# Altium PCB MAM17_chopper.PcbDoc
Units mil, origin at the board's own origin, x right, y up, seen from the top; angles counter-clockwise.
Board outline 3937.08 x 4724.82 mil, 2 copper layers (Top Layer, Bottom Layer); 31 components, 42 nets, 94 pads, 16 vias.
Unrouted connection lines stored in the file: 15.
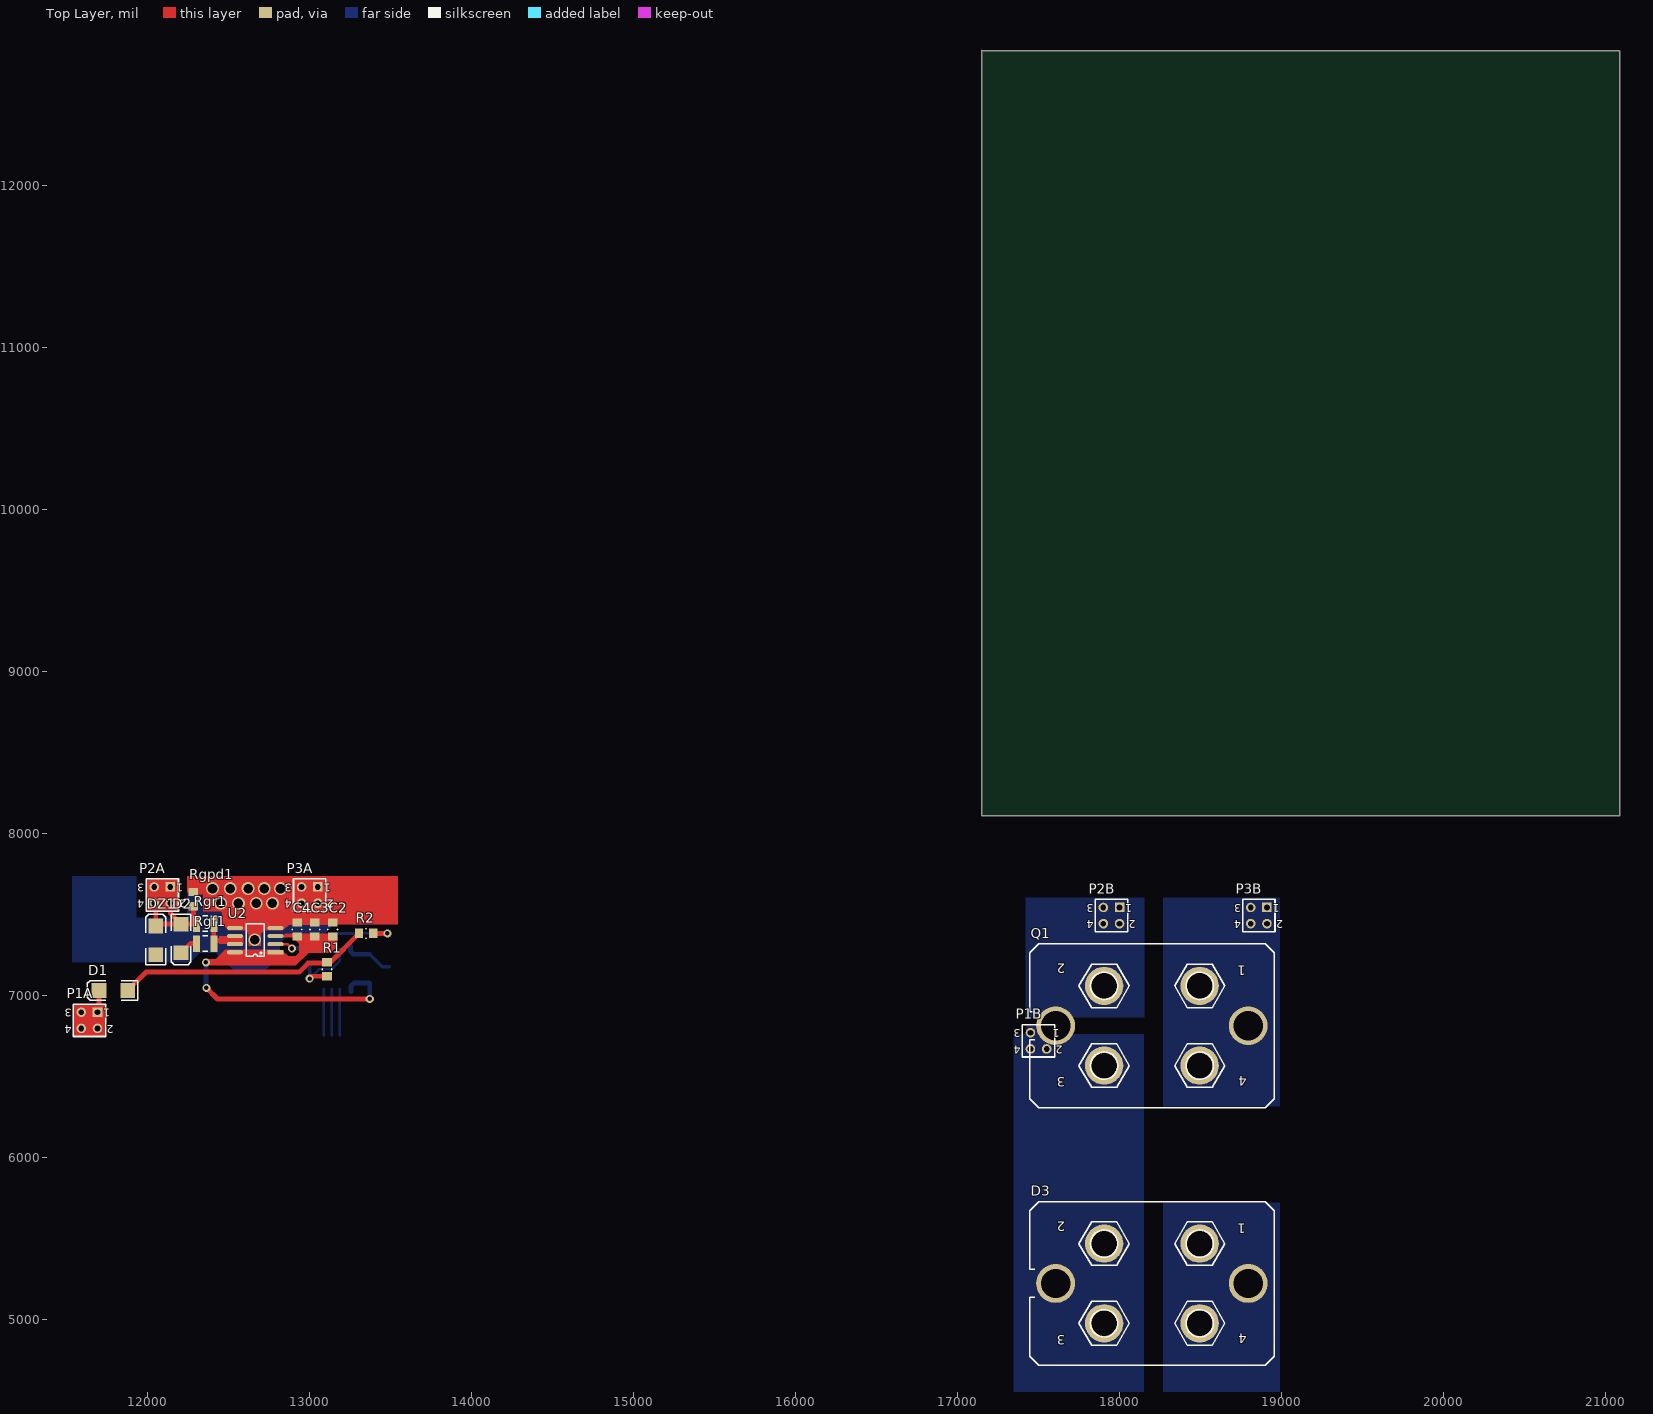
[diagram p0: Top Layer view]
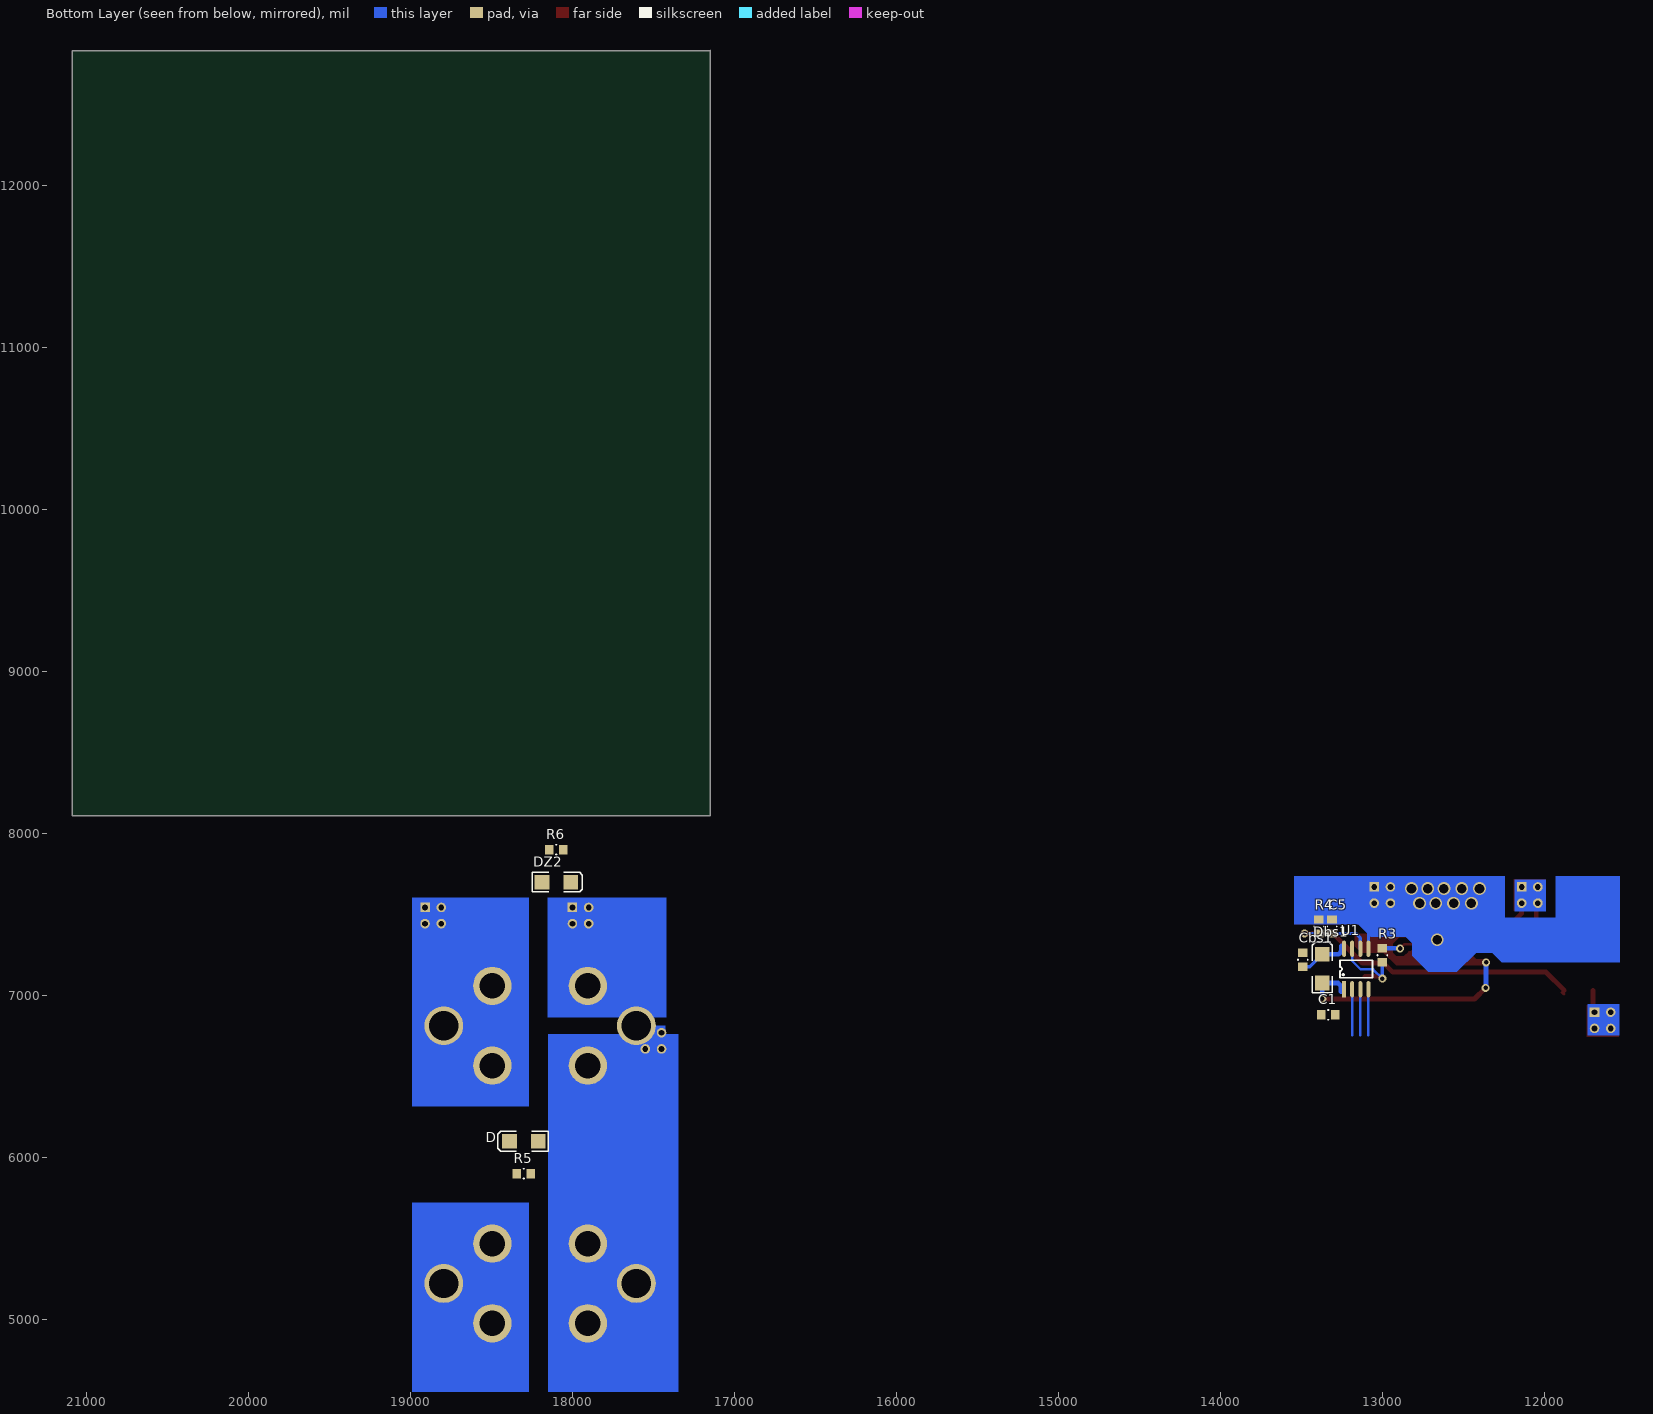
[diagram p1: Bottom Layer view, seen from below]

## Layer stack, top to bottom
Top Layer: signal copper 1.4
Dielectric: dielectric 12.6, FR-4, Dk 4.8
Bottom Layer: signal copper 1.4

## Board outline
17150,8110 17150,12834.41 17149.96,12833.98 21086.97,12833.98 21087,12834 21087,8109.59 21087.04,8110.02

## Design rules (kind name [scope] priority, off if disabled: settings)
Clearance [All] p1: gap=20
PolygonConnect [All] p1: connectstyle=Relief reliefconductorwidth=10 reliefentries=4 polygonreliefangle="90 Angle"
RoomDefinition driver [InComponentClass('driver')] p1: confinementstyle=ConfineIn formatcopy=TRUE lockcomponents=FALSE outline 0,0 2000,0 2000,1000 0,1000
RoomDefinition chopper [InComponentClass('chopper')] p2: confinementstyle=ConfineIn formatcopy=TRUE lockcomponents=FALSE outline 0,0 2000,0 2000,1000 0,1000
RoomDefinition atmega [InComponentClass('atmega')] p3: confinementstyle=ConfineIn formatcopy=TRUE lockcomponents=FALSE outline 0,0 2000,0 2000,1000 0,1000
RoutingVias [All] p1: holewidth=28 width=50 viastyle="Through Hole" minholewidth=28 minwidth=50 maxholewidth=78.74 maxwidth=78.74
SilkscreenOverComponentPads [All] p1: minsilkscreentomaskgap=10
SolderMaskExpansion [All] p1: expansion=4
Width [All] p1: maxlimit=30 minlimit=15 preferedwidth=20
27 further rules are at their usual default settings.

## Classes and differential pairs
component class chopper: C6 C7 C8 C9 C10 C11 C12 C13 C1009 D D3 DZ2 P1B P2B P3B Q1 R5 R6
component class driver: C1 C2 C3 C4 C5 Cbs1 D1 D2 Dbs1 DZ1 P1 P1A P2 P2A P3 P3A R1 R2 R3 R4 Rgf1 Rgpd1 Rgr1 U1 U2 U*1

## Components (designator, comment, footprint, x,y, rotation, side; value= is the part's Value field where it differs from the comment)
C1 "100nF" 0805C 13334.02,6879.91 r180 bottom
C2 "100nF" 0805C 13142,7407.68 r90 top
C3 "1uF" 0805C 13032,7407.68 r90 top
C4 "10uF" 0805C 12922,7407.68 r90 top
C5 "100nF" 0805C 13310.73,7426.18 r90 bottom
Cbs1 "100nF" 0805C 13491,7221 r90 bottom
D "ES3B" DSO-C2/X2.3 18300,6100 r0 bottom
D1 "BYD77" DSO-C2/X2.3 11788,7031 r180 top
D2 "ES3B" DSO-C2/X2.3 12206,7352 r270 top
D3 "DSEI2x101" SOT-227B 18200,5222 r180 top locked
Dbs1 "BAV102" DSO-C2/X2.3 13371.02,7165.91 r90 bottom
DZ1 "Z15V" DSO-C2/X2.3 12050,7340 r90 top
DZ2 "Z15V" DSO-C2/X2.3 18100,7700 r180 bottom
P1A "DRAIN" HDR2X2 11690,6896.68 r180 top locked
P1B "DRAIN" HDR2X2 17550,6770 r180 top locked
P2A "GATE" HDR2X2 12140,7670 r180 top locked
P2B "GATE" HDR2X2 18000,7543.32 r180 top locked
P3A "SOURCE" HDR2X2 13050,7670 r180 top locked
P3B "SOURCE" HDR2X2 18910,7543.32 r180 top locked
Q1 "IXFN420N10T" SOT-227B 18200,6813 r180 top locked
R1 "22K" 0805R 13107,7162 r90 top
R2 "10K" 0805R 13348.43,7382.87 r180 top
R3 "0R" 0805R 13000.02,7248.58 r90 bottom
R4 "820R" 0805R 13391.73,7426.18 r270 bottom
R5 "???" 0805R 18300,5900 r180 bottom
R6 "10k" 0805R 18100,7900 r180 bottom
Rgf1 "4R7" RESC3225L 12355,7320 r0 top
Rgpd1 "10k" 0805R 12282,7595 r270 top
Rgr1 "10R" RESC3225L 12355,7444 r0 top
U1 "IR2127S" SOIC08-150(50) 13236.02,7038.58 r180 bottom
U2 "UCC2732x" SOIC08-THERMAL 12789,7266.68 r90 top

## Footprints (in the part's own frame and the unit in brackets; to place one, negate y for a bottom-side part, rotate by r counter-clockwise, add the part's x,y. Pads: shape width x height; smd on the part's side, far side on the other; paste and mask are expansions set on the pad)
0805C [mm] "Chip Capacitor; Body 2 x 1.3 mm (LxW typ)"
  rect 1.3x1.5 smd: 1(-1.1,0) 2(1.1,0)
  silkscreen extent -0.05,-0.76 0.05,0.76, body extent -1,-0.64 1,0.62, height 0.78
0805R [mm] "Chip Resistor; Body 2 x 1.3 mm (LxW typ)"
  rect 1.3x1.5 smd: 1(1.1,0) 2(-1.1,0)
  silkscreen extent -0.05,-0.76 0.05,0.76, body extent -0.99,-0.63 1.01,0.63, height 0.8
DSO-C2/X2.3 [mm] "DO-214-AA/SMB; 2 C-Bend Leads; Body 5.3 x 3.6 mm, inc. leads (LxW)"
  rect 2.3x2.3 smd: 1(-2.25,0) 2(2.25,0)
  silkscreen extent -3.8,-1.55 4.1,1.55, body extent -2.62,-1.35 2.58,1.32, height 1.34
HDR2X2 [mm] "Connector; Header; 2x2 Position"
  rect 1.5x1.5 hole 0.9: 1(0,0)
  round 1.5 hole 0.9: 2(0,2.54) 3(2.54,0) 4(2.54,2.54)
  silkscreen extent -1.27,-1.27 3.81,3.81
RESC3225L [mm] "Chip Resistor, Body 3.2x2.5mm, IPC High Density"
  rect 1.1x2.6 smd: 1(-1.35,0) 2(1.35,0)
  silkscreen extent -0.4,-1.2 0.4,1.2, body extent -1.6,-0.79 1.6,0.81, height 0.55
SOIC08-150(50) [mil] "SOIC; 8 Leads; Row Spacing 3.81 mm; Pitch 1.27 mm; 3D Antonio Fagaldo"
  rect 25x100 smd: 1(0,0)
  oval 25x100 smd: 2(50,0) 3(100,0) 4(150,0) 5(150,250) 6(100,250) 7(50,250) 8(0,250)
  silkscreen extent -25,70 175,180, body extent -20,4 173,246, height 69
SOIC08-THERMAL [mil] "SOIC; 8 Leads; Row Spacing 3.81 mm; Pitch 1.27 mm; 3D Antonio Fagaldo"
  rect 25x100 smd: 1(0,0)
  oval 25x100 smd: 2(50,0) 3(100,0) 4(150,0) 5(150,250) 6(100,250) 7(50,250) 8(0,250)
  Top Layer region: 40,90 114.02,90 114.02,164.02 40,164.02
  silkscreen extent -25,70 175,180, body extent -20,4 173,246, height 69
SOT-227B [mm] "SOT-227; 4 Screw Terminals, 2 Mounting Holes"
  round 6 hole 4: 1(-7.493,-6.248) 2(7.493,-6.248) 3(7.493,6.248) 4(-7.493,6.248)
  round 6.1 hole 4.6: MH1(-15.1,0) MH2(15.1,0)
  silkscreen extent -19.15,-12.85 19.15,12.85, body extent -19.05,-12.45 19.05,12.45, height 12.02

## Part data
C1 C2 C3 C4 C5 Cbs1: library part Cap_0805, "Capacitor"
D D1 D2 Dbs1 DZ1 DZ2: library part Diode_SMA, "Diode"
P1A P1B P2A P2B P3A P3B: library part "Header 2X2", "Header, 2-Pin, Dual row"
R1 R2 R3 R4 R5 R6 Rgf1 Rgpd1 Rgr1: library part Res_0805, "Resistor"
U1: "Current Sensing Single Channel Driver"

## Via types
v1: diameter 78.74, hole 59.06, Top Layer to Bottom Layer, 10 vias
v2: diameter 50, hole 28, Top Layer to Bottom Layer, 6 vias

## Nets (pads, with @x,y where several pads share a name; then routed paths per layer and width w, separated by ;. In a path a pad name is that pad's centre, name@x,y a point inside that pad or via, vN(x,y) a via of type N, cw(c..) or ccw(c..) an arc to the next point about the centre after c; other vN are vias at no path point)
+5V: 
+5V_ADC: 
+15V: C1.1 C2.1 C3.1 C4.1 Dbs1.1 U1.1 U2.1 U2.3 U2.8 | length 2546.9
  Top Layer w10: U2.3 U2.3@12790,7366.68
  Top Layer w15: v2(12358.87,7204.09) 12360.21,7202.76 12410.43,7202.76 12474.35,7266.68 U2.8 U2.1 12833.32,7266.68 12862.5,7237.5 12917.5,7237.5 12942.5,7262.5 12942.5,7332.25 12922,7352.75 C4.1 ; U2.3 C4.1@12922,7366.68
  Top Layer w30: v2(12362.2,7047.24) 12431.06,6978.39 v2(13371.02,6978.39) ; C4.1 C3.1 C2.1
  Bottom Layer w15: v2@12358.52,7203.74 v2(12358.87,7204.09)
  Bottom Layer w30: v2@12358.87,7050.58 v2(12358.87,7204.09) ; 13254.92,7022.64 13254.92,7038.58 13254.92,7057.48 13274.76,7077.32 Dbs1.1 v2(13371.02,6978.39)
+18V: 
+18V_PRE: 
BUZZER: 
CAN_GND: C1.2 C2.2 C3.2 C4.2 C5.2 Cbs1.2 DZ1.1 DZ2.1 P3A.1 P3A.2 P3A.3 P3A.4 P3B.1 P3B.2 P3B.3 P3B.4 Q1.1 Q1.4 R4.2 R6.2 Rgpd1.2 U1.4 U1.5 U2.4 U2.5 | length 1178.1
  Top Layer w15: U2.4 12823.31,7450.98 12860.24,7450.98
  Top Layer w30: Rgpd1.2 12358.31,7638.31 ; 12860.24,7450.98 C4.2 C3.2 C2.2
  Bottom Layer w15: 13086.02,6753.91 U1.4
  Bottom Layer w20: U1.5 13086.02,7406.89 13148.62,7469.49 C5.2 R4.2
  other v1: 12661.42,7343.5 12450,7570 12560,7570 12670,7570 12770,7570 12400,7660 12510,7660 12620,7660 12720,7660 12820,7660
CAN_H: 
CAN_L: 
DRAIN: D1.2 D3.2 D3.3 D.1 P1A.1 P1A.2 P1A.3 P1A.4 P1B.1 P1B.2 P1B.3 P1B.4 Q1.3 R5.1 | length 138.2
  Top Layer w30: P1A.1 11699.42,6906.09 D1.2
GATE: D2.1 DZ1.2 DZ2.2 P2A.1 P2A.2 P2A.3 P2A.4 P2B.1 P2B.2 P2B.3 P2B.4 Q1.2 R6.1 Rgpd1.1 Rgr1.1 | length 624.1
  Top Layer w30: DZ1.2 P2A.4@12050,7560 ; DZ1.2@12062,7440.58 D2.1 ; P2A.2 12140,7506.58 D2.1 ; Rgr1.1@12282,7457.02 Rgpd1.1 ; Rgr1.1 12298.43,7440.58 D2.1
IR2127_FAULT: U1.3 | length 284.7
  Bottom Layer w15: 13136.02,6753.91 U1.3
IROUT: R1.2 R3.2 U1.7 | length 520.9
  Top Layer w30: v2(13000.02,7103.89) 13014.83,7118.69 R1.2
  Bottom Layer w15: v2(13000.02,7103.89) 13056.72,7160.58 13133.02,7160.58 13186.02,7213.58 U1.7
  Bottom Layer w20: v2(13000.02,7103.89) R3.2
LED: 
MCP2515_INT: 
MCP2515_MISO: 
MCP2515_MOSI: 
MCP2515_SCK: 
MCP2515_SS: 
NetC5_1: C5.1 R2.2 R4.1 U1.6 | length 511.1
  Top Layer w30: R2.2 v2(13480.31,7382.87)
  Bottom Layer w15: C5.1 R4.1 v2@13470.73,7382.87
  Bottom Layer w20: U1.6 13136.02,7355.51 13163.39,7382.87 C5.1 ; v2@13470.73,7382.87 v2(13480.31,7382.87)
NetC1009_2: D.2 R5.2
NetC1012_1: 
NetC1014_2: 
NetC1015_2: 
NetCbs1_1: Cbs1.1 Dbs1.2 U1.8 | length 310.8
  Bottom Layer w20: Dbs1.2 13447.82,7177.69 Cbs1.1
  Bottom Layer w30: 13251.97,7305.12 13251.97,7288.58 13251.97,7272.64 13270.12,7254.49 Dbs1.2
NetD1_1: D1.1 R1.1 R2.1 | length 1595.2
  Top Layer w20: D1.1@11879.08,7009.5 D1.1@11888.58,7019 ; R1.1@13101.69,7200 R1.1
  Top Layer w30: D1.1 11989.67,7144.09 12934.45,7144.09 12990.35,7200 13101.69,7200 13107,7200 13122.24,7200 R2.1
NetD2_2: D2.2 Rgf1.1 | length 119.3
  Top Layer w30: D2.2 12262.58,7320 Rgf1.1
NetD3_1: D3.1 D3.4
NetLD1001_1: 
NetR1003_2: 
NetR1005_1: 
NetRgf1_2: Rgf1.2 Rgr1.2 U2.6 U2.7 | length 245.7
  Top Layer w15: Rgf1.2 Rgf1.2@12418.15,7330
  Top Layer w30: Rgf1.2 Rgf1.2@12408.15,7340 ; Rgr1.2 Rgf1.2@12408.15,7340 ; 12515.68,7340 Rgf1.2@12408.15,7340
PWM: U1.2 | length 284.7
  Bottom Layer w15: 13186.02,6753.91 U1.2
RXCAN: 
SINK_T: 
TXCAN: 
UCCIN: R3.1 U2.2 | length 222.9
  Top Layer w15: U2.2 12863.32,7316.68 v2(12890,7290)
  Bottom Layer w30: v2(12890,7290) 12891.89,7291.89 R3.1
USART_RTS: 
USART_RX: 
USART_TX: 
XTAL1: 
XTAL2: 
pads on no net: D3.MH1 D3.MH2 Q1.MH1 Q1.MH2
copper on no net: | length 492.1
  Bottom Layer w50: 17916.51,6263.49 18072,6108
  Bottom Layer w60: 17916.51,6365.49 18109,6173

## Other copper
Top Layer:
  rectangle net CAN_GND: 12340,7520 12450,7720
  rectangle net NetRgf1_2: 12440,7316.68 12590,7366.68
  rectangle net DRAIN: 11540,6742.68 11740,6942.68
  rectangle net GATE: 11990,7520 12190,7720
  region net +15V: 12342.52,7185.04 12342.52,7224.41 12421.26,7224.41 12480.32,7283.46 12816.7,7283.46 12862.5,7237.5 12917.5,7237.5 12942.5,7262.5 12942.5,7313.98 12893.7,7362.2 12814.96,7362.2 12814.96,7366.68 12834.65,7366.68 12849.86,7381.89 13169.29,7381.89 13169.29,7303.15 13129.92,7263.78 12993.11,7263.78 12914.37,7185.04
  region net CAN_GND: 13543.31,7736.22 12244.09,7736.22 12244.09,7637.8 12244.61,7638.31 12342.52,7638.31 12342.52,7519.69 12342.83,7520 12450,7520 12460.63,7509.37 12460.63,7440.94 12500,7401.57 12604.1,7401.57 12624.98,7380.69 12624.98,7306.68 12699,7306.68 12699,7380.69 12719.88,7401.57 12834.65,7401.57 12874.02,7440.94 13543.31,7440.94
Bottom Layer:
  rectangle net DRAIN: 11535.43,6751.97 11732.28,6948.82
  rectangle net GATE: 11988.19,7519.69 12185.04,7716.54
  region net CAN_GND: 18268.6,7605 18268.6,6313 18990,6313 18990,7605
  region net GATE: 18154.43,6863 18154.43,7605 17420,7605 17420,6863
  region net DRAIN: 17345,6763 17345,4455 18150.83,4455 18150.83,6763
  region net NetD3_1: 18268.6,5722 18268.6,4455 18990,4455 18990,5722
  rectangle: 17495,6635 17755,6763
  rectangle: 17425,6635 17605,6815
  region net CAN_GND: 13543.31,7736.22 12244.09,7736.22 12244.09,7480.31 11929.13,7480.31 11929.13,7736.22 11535.43,7736.22 11535.43,7204.72 12263.78,7204.72 12322.83,7263.78 12421.26,7263.78 12539.37,7145.67 12716.54,7145.67 12814.96,7244.09 12814.96,7322.83 12854.33,7362.2 13070.87,7362.2 13149.61,7440.94 13543.31,7440.94

## Silkscreen, mask and mechanical layers (free items; w line width, h text height)
Mechanical 1:
  lines w10: 17149.96,12833.98 21086.97,12833.98 ; 17150,8110 17150,12834.41 ; 17150.03,8110.02 21087.04,8110.02 ; 17309,4415 17309,7808 ; 17315,4413 19275,4413 ; 17315,7812 19275,7812 ; 19269,4415 19269,7808 ; 21087,8109.59 21087,12834

## Text inside footprints (layer, text, board x,y; h text height)
D3: Top Overlay "1" at 18778.74,5592.08 h59.05 r180; Top Overlay "2" at 17664.57,5603.89 h59.05 r180; Top Overlay "3" at 17664.57,4903.1 h59.05 r180; Top Overlay "4" at 18786.61,4910.98 h59.05 r180
P1A: Top Overlay "3" at 11530,6916.68 h50 r180; Top Overlay "4" at 11530,6816.68 h50 r180; Top Overlay "2" at 11790,6816.68 h50 r180; Top Overlay "1" at 11770,6916.68 h50 r180
P1B: Top Overlay "3" at 17390,6790 h50 r180; Top Overlay "4" at 17390,6690 h50 r180; Top Overlay "2" at 17650,6690 h50 r180; Top Overlay "1" at 17630,6790 h50 r180
P2A: Top Overlay "3" at 11980,7690 h50 r180; Top Overlay "4" at 11980,7590 h50 r180; Top Overlay "2" at 12240,7590 h50 r180; Top Overlay "1" at 12220,7690 h50 r180
P2B: Top Overlay "3" at 17840,7563.32 h50 r180; Top Overlay "4" at 17840,7463.32 h50 r180; Top Overlay "2" at 18100,7463.32 h50 r180; Top Overlay "1" at 18080,7563.32 h50 r180
P3A: Top Overlay "3" at 12890,7690 h50 r180; Top Overlay "4" at 12890,7590 h50 r180; Top Overlay "2" at 13150,7590 h50 r180; Top Overlay "1" at 13130,7690 h50 r180
P3B: Top Overlay "3" at 18750,7563.32 h50 r180; Top Overlay "4" at 18750,7463.32 h50 r180; Top Overlay "2" at 19010,7463.32 h50 r180; Top Overlay "1" at 18990,7563.32 h50 r180
Q1: Top Overlay "4" at 18786.61,6501.98 h59.05 r180; Top Overlay "3" at 17664.57,6494.1 h59.05 r180; Top Overlay "2" at 17664.57,7194.89 h59.05 r180; Top Overlay "1" at 18778.74,7183.08 h59.05 r180